# EAGLE board ESP32 30Pin Large Map (EAGLE 9.6.2)
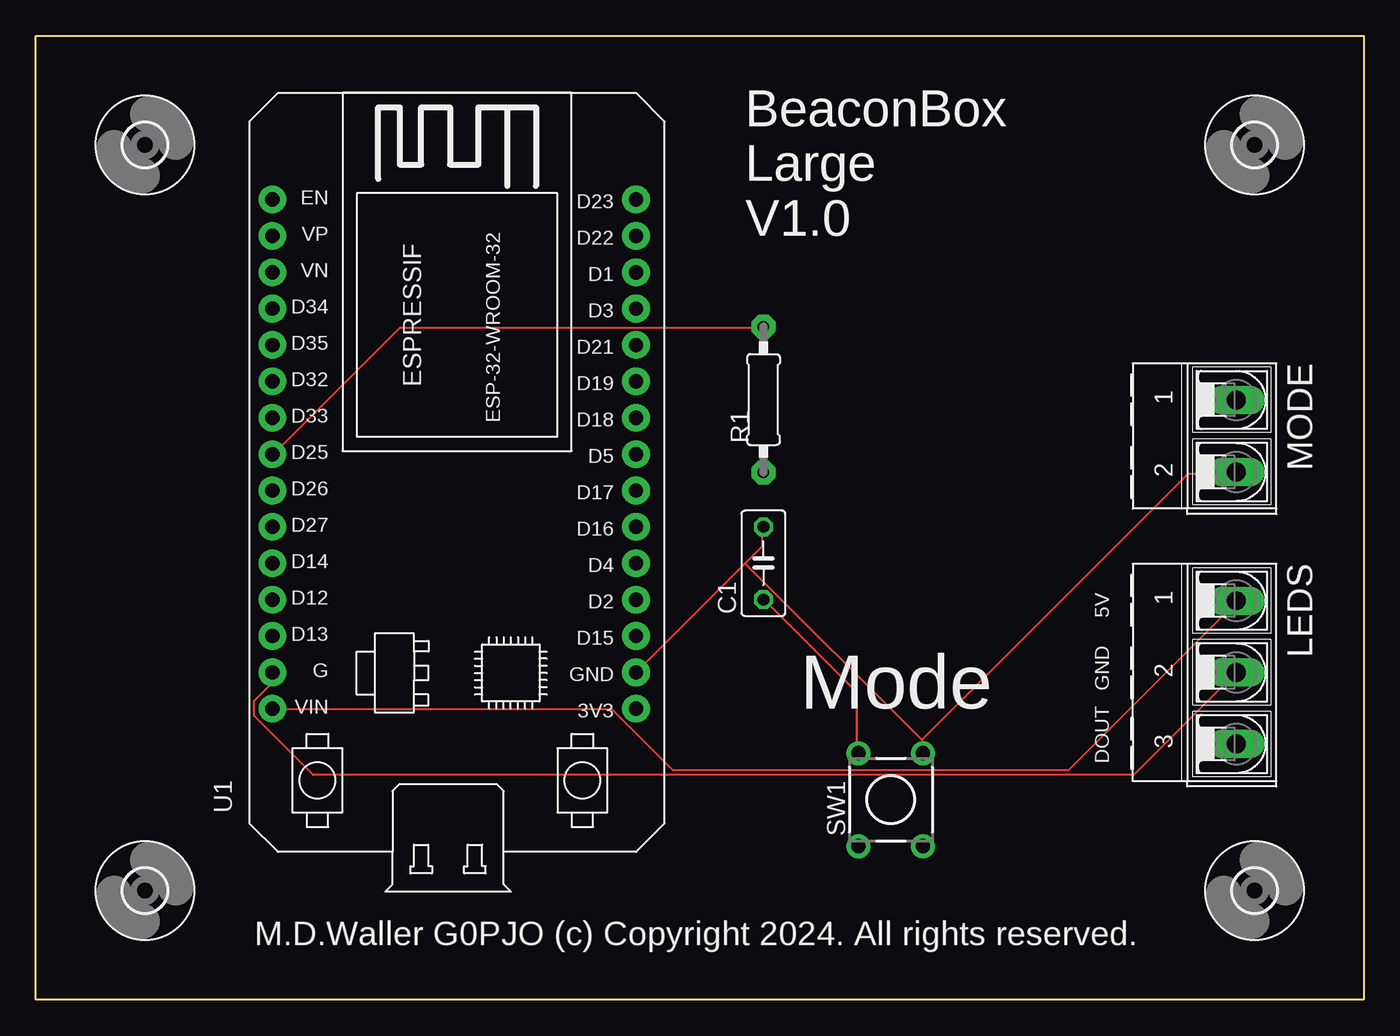
[diagram p0: board, top side]
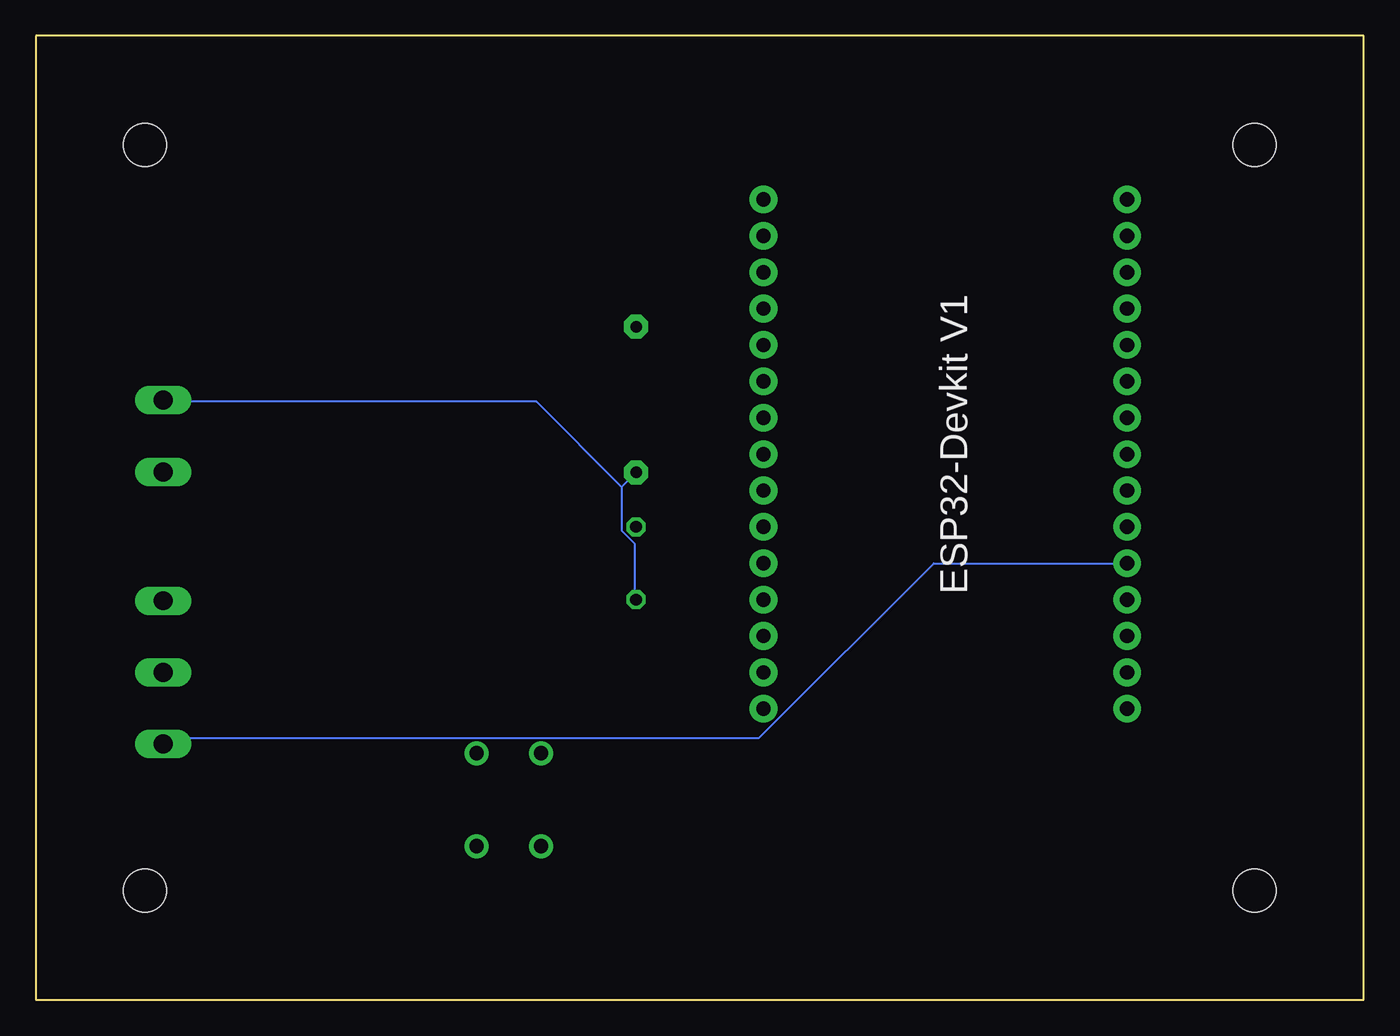
[diagram p1: board, bottom side, seen from below]

Size 92.71 x 67.31 mm. Coordinates in mm from the lower left corner, seen from the top.
Outline: 0,0 0,67.31 92.71,67.31 92.71,0 0,0
Copper layers (1*16): Top 0.035mm / dielectric 1.5mm / Bottom 0.035mm
Design rules "default": minimum track width 6mil, minimum drill 0.35mm, track to track 6mil, track to pad 6mil, pad to pad 6mil, via to via 6mil, smd to smd 6mil, copper to edge 40mil, drill to drill 6mil, minimum pad ring 10mil, minimum via ring 8mil, stop-mask expansion 4mil, vias tented up to drill 0mil, thermal gap 10mil

## Footprints (pad centres in the part's own frame; a part is rotated, then mirrored left to right if it is on the bottom)
C050-030X075 = drill 0.813 octagon: 1 -2.54,0; 2 2.54,0
3,0 = hole 3: 0,0
AK500/3-H = drill 1.321 long: 1 -5.004,0; 2 0,0; 3 5.004,0
AK500/2-H = drill 1.321 long: 1 -2.515,0; 2 2.515,0
0207/10 = drill 0.8 pad 1.676 octagon: 1 -5.08,0; 2 5.08,0
TL1105 = drill 1 pad 1.676: 1 -2.25,3.25; 2 2.25,3.25; 3 -2.25,-3.25; 4 2.25,-3.25
ESP32-DEVKITV1 = drill 1 pad 1.93: 3V3 0,0; D1 30.48,0; D2 7.62,0; D3 27.94,0; D4 10.16,0; D5 17.78,0; D12 7.62,25.4; D13 5.08,25.4; D14 10.16,25.4; D15 5.08,0; D16 12.7,0; D17 15.24,0; D18 20.32,0; D19 22.86,0; D21 25.4,0; D22 33.02,0; D23 35.56,0; D25 17.78,25.4; D26 15.24,25.4; D27 12.7,25.4; D32 22.86,25.4; D33 20.32,25.4; D34 27.94,25.4; D35 25.4,25.4; EN 35.56,25.4; GND 2.54,25.4; GND@1 2.54,0; VIN 0,25.4; VN 30.48,25.4; VP 33.02,25.4

## Placement (x,y rotation side)
C1  1nf  [C050-030X075]  50.8,30.48 90 top
H1  [3,0]  7.62,7.62 0 top
H2  [3,0]  7.62,59.69 0 top
H3  [3,0]  85.09,59.69 0 top
H4  [3,0]  85.09,7.62 0 top
LEDS  [AK500/3-H]  83.82,22.86 270 top
MODE  [AK500/2-H]  83.82,39.37 270 top
R1  470R  [0207/10]  50.8,41.91 270 top
SW1  [TL1105]  59.69,13.97 0 top
U1  [ESP32-DEVKITV1]  41.91,20.32 90 top

## Library data of the parts
C1 R1 = Clean-Kong
H1-H4 = holes
LEDS MODE = con-ptr500
SW1 = switch
U1 = ESP32-DEVKITV1

## Nets
S$1: LEDS.1 U1.VIN
S$2: LEDS.2 U1.GND
S$3: LEDS.3 U1.D14
S$4: R1.1 U1.D25
S$5: C1.2 MODE.2 SW1.2 U1.GND@1
S$6: C1.1 MODE.1 R1.2 SW1.1

## Tracks (layer width: path | path; a pad name or v marks a point on that pad's centre or on a via)
S$1
  Top 0.152: U1.VIN 16.61,20.27 40.23,20.27 44.5,16 72.08,16 83.82,27.74 LEDS.1
S$2
  Top 0.152: LEDS.2 76.66,15.7 19.36,15.7 15.24,19.81 15.24,20.88 16.46,22.1 16.46,22.86 U1.GND
S$3
  Bottom 0.152: U1.D14 30.02,30.48 42.22,18.29 83.52,18.29 83.82,17.98 LEDS.3
S$4
  Top 0.152: R1.1 50.75,46.94 25.45,46.94 16.61,38.1 U1.D25
S$5
  Top 0.152: U1.GND@1 49.53,30.48 | 49.53,30.48 50.75,31.7 50.75,32.92 C1.2 | 61.87,18.14 61.87,17.22 SW1.2 | 49.53,30.48 61.87,18.14 | 61.87,18.14 80.47,36.73 83.82,36.73 MODE.2
S$6
  Top 0.152: SW1.1 57.3,17.22 57.3,21.49 50.9,27.89 C1.1
  Bottom 0.152: 51.82,35.81 51.82,32.77 50.9,31.85 50.9,28.04 C1.1 | R1.2 51.82,35.81 | 51.82,35.81 57.76,41.76 83.82,41.76 MODE.1

## Text on the board
tNames: BeaconBox / Large / V1.0 | 5V | GND | Mode | DOUT | M.D.Waller G0PJO (c) Copyright 2024. All rights reserved.